# Altium PCB PCB_LED.PcbDoc
Units mil, origin at the board's own origin, x right, y up, seen from the top; angles counter-clockwise.
Board outline 600 x 300 mil, 2 copper layers (Top Layer, Bottom Layer); 3 components, 3 nets, 6 pads, 0 vias.
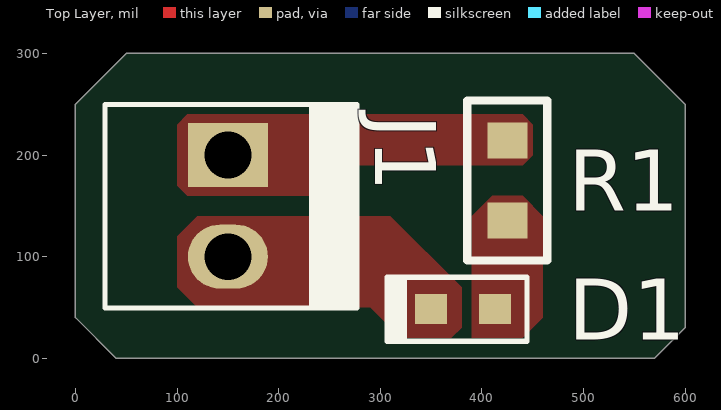
[diagram p0: Top Layer view]
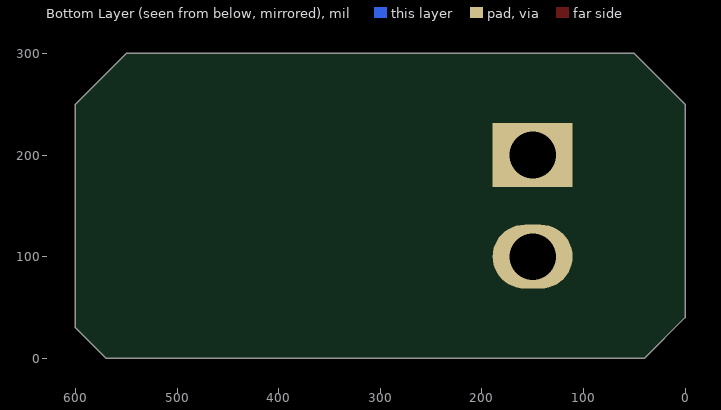
[diagram p1: Bottom Layer view, seen from below]
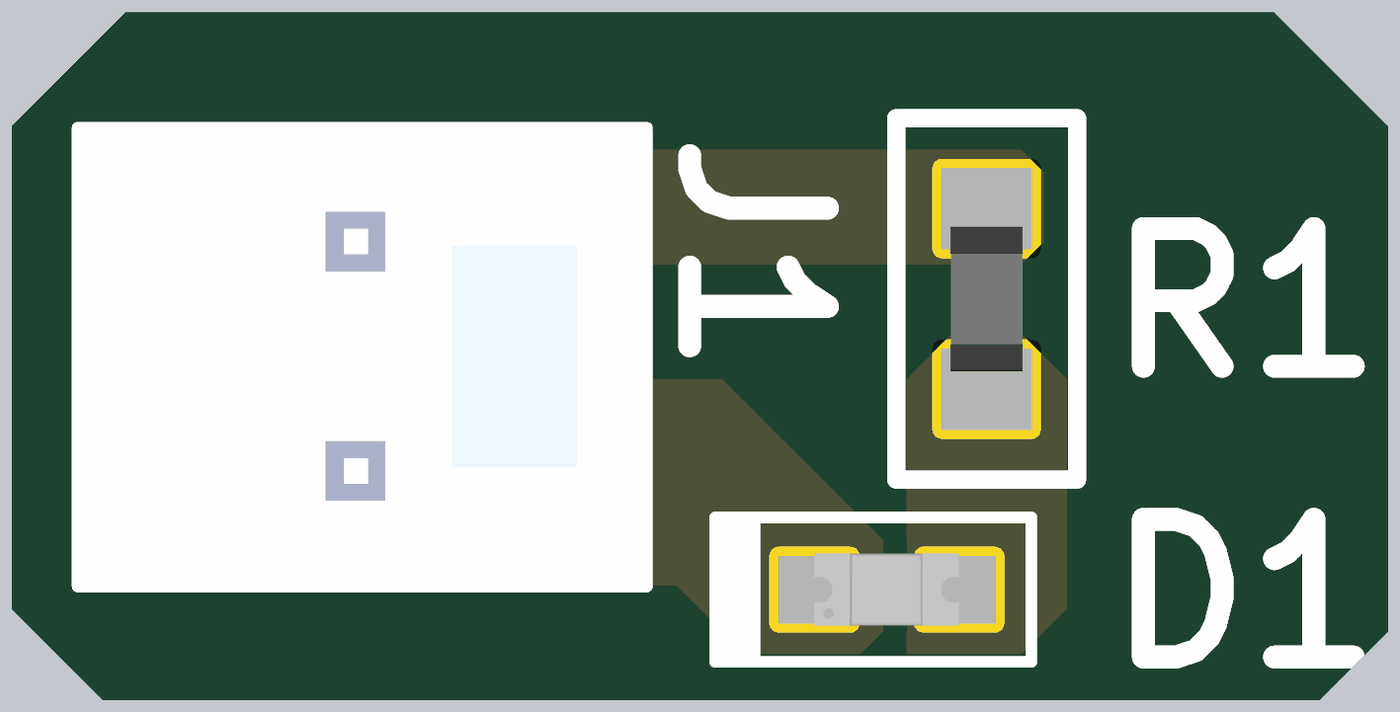
[diagram p2: 3D render of the assembled board from above, using the file's embedded part models]

## Layer stack, top to bottom
Top Solder: solder mask 0.4, Solder Resist, Dk 3.5
Top Layer: signal copper 1.4
Dielectric 1: dielectric 12.6, FR-4, Dk 4.8
Bottom Layer: signal copper 1.4
Bottom Solder: solder mask 0.4, Solder Resist, Dk 3.5

## Board outline
40,0 570,0 600,30 600,250 550,300 50,300 0,250 0,40

## Design rules (kind name [scope] priority, off if disabled: settings)
Clearance [All] p1: gap=10 ignorepadtopadclearanceinfootprint=FALSE except(0: Arc-Hole Track-Hole SMDPad-Hole THPad-Hole Via-Hole Fill-Hole Poly-Hole Region-Hole Text-Hole)
PolygonConnect [All] p1: connectstyle=Direct reliefconductorwidth=10 reliefentries=4 polygonreliefangle="90 Angle" airgapwidth=10
RoutingVias [All] p1: holewidth=28 width=50 viastyle="Through Hole" minholewidth=28 minwidth=50 maxholewidth=28 maxwidth=50
SolderMaskExpansion [All] p1: expansion=4 istentingtop=FALSE
Width [All] p1: maxlimit=10 minlimit=10 preferedwidth=10
30 further rules are at their usual default settings.

## Components (designator, comment, footprint, x,y, rotation, side; value= is the part's Value field where it differs from the comment)
D1 "Green LED" GREEN_LED 381.5,48.25 r0 top
J1 "1x2 Header" Molex_1x2 150,150 r0 top
R1 "68R RESISTOR" R68 425,175 r90 top

## Footprints (in the part's own frame and the unit in brackets; to place one, negate y for a bottom-side part, rotate by r counter-clockwise, add the part's x,y. Pads: shape width x height; smd on the part's side, far side on the other; paste and mask are expansions set on the pad)
GREEN_LED [mm]
  rect 0.8x0.75 smd: 1(-0.8,0) 2(0.8,0)
  silkscreen extent -1.9,-0.8 1.6,0.8, body extent -0.8,-0.4 0.8,0.4, height 0.41
Molex_1x2 [mm]
  rect 2x1.6 hole 1.17: 1(0,1.27)
  oval 2x1.6 hole 1.17: 2(0,-1.27)
  silkscreen extent -3.08,-2.55 3.23,2.53, body extent -3.1,-2.54 3.25,2.54, height 10.68
R68 [mm]
  rect 0.9x1 smd: 1(-1,0) 2(1,0)
  silkscreen extent -2,-1 2,1, body extent -0.8,-0.4 0.8,0.4, height 0.46

## Part data
D1: library part 150060VS55040, "WL-SMCD SMT Mono-color Chip LED Diffused", Case Code (Imperial)=0603, Case Code (Metric)=1608, Color=Green, Forward Current=40mA, Forward Voltage=2V, Manufacturer="Wurth Electronics", Max Operating Temperature=85°C, Max Reverse Voltage (DC)=5V, Min Operating Temperature=-40°C, Power Dissipation=48mW, Supplier Part Number 1=732-12017-1-ND, Test Current=20mA, Case/Package=0603, Category=LEDs, ComponentLink1Description=http://www.farnell.com/datasheets/2621647.pdf?src-supplier=Farnell, ComponentLink1URL=http://www.farnell.com/datasheets/2621647.pdf?src-supplier=Farnell, ComponentLink2Description=https://www.we-online.de/web/en/index.php/download/media/07_electronic_components/download_center_1/application_notes_berichte/ano002_leds___the_future_of_horticultural_lighting/ANO002b_EN_LEDs_The_Future_of_Horticultural_Lighting.pdf?src-supplier=Digikey, ComponentLink2URL=https://www.we-online.de/web/en/index.php/download/media/07_electronic_components/download_center_1/application_notes_berichte/ano002_leds___the_future_of_horticultural_lighting/ANO002b_EN_LEDs_The_Future_of_Horticultural_Lighting.pdf?src-supplier=Digikey, ComponentLink3Description=https://katalog.we-online.de/pbs/datasheet/150060VS55040.pdf?src-supplier=Digikey, ComponentLink3URL=https://katalog.we-online.de/pbs/datasheet/150060VS55040.pdf?src-supplier=Digikey, ComponentLink4Description=http://www.farnell.com/datasheets/2621647.pdf?src-supplier=Element14, ComponentLink4URL=http://www.farnell.com/datasheets/2621647.pdf?src-supplier=Element14, ComponentLink5Description=http://www.farnell.com/datasheets/2621647.pdf?src-supplier=Newark, ComponentLink5URL=http://www.farnell.com/datasheets/2621647.pdf?src-supplier=Newark, Dominant Wavelength=573nm, Height=0.5mm, Length=1.6mm, Lens Size=0.8mm, Lens Style=Flat, Lens Transparency=Diffused, Luminous Intensity=60mcd, Manufacturer Part Number=150060VS55040, Mount="Surface Mount", Packaging="Cut Tape", Pricing 1="1=0,19, 10=0,173, 100=0,157, 500=0,141, 1000=0,125 (USD)", Reverse Voltage=5V, RoHS=Yes, RoHS Compliant=Yes, Series=WL-SMDC, Stock 1=10387, Supplier 1=Digikey, Viewing Angle=140°, Wavelength=573nm, Width=0.8mm
J1: library part 22-29-2021, "KK 254 Wire-to-Board Header, Vertical, with Friction Lock, 2 Circuits, Gold (Au) Plating", Color=White, Flammability Rating="UL94 V-0", Housing Color=Natural, Manufacturer=Molex, Package Quantity=24000, Supplier Part Number 1=WM2744-ND, Voltage Rating (DC)=250V, Category="Headers and Wire Housings", Contact Material=Tin, Contact Plating=Gold, Contact Type=-, Gender=Male, Glow Wire Compliant=Non-compliant, Halogen Free="Low Halogen", Lead Free="Lead Free", Manufacturer Part Number=22-29-2021, Number of Positions=2, Number of Rows=1, Packaging=Bulk, Plating=Tin, Pricing 1="1=0,34, 10=0,286, 100=0,2225, 3000=0,18654 (USD)", Reach SVHC Compliant=Unknown, RoHS=Yes, RoHS Compliant=Yes, Series=6410, Stock 1=124558, Supplier 1=Digikey, Termination="Through Hole"
R1: library part CRCW080568R0FKEAC, "SMD Chip Resistor, 68 Ohm, ± 1%, 125 mW, 0805 [2012 Metric], Thick Film, General Purpose", Manufacturer=Vishay, Supplier Part Number 1=541-CRCW080568R0FKEACCT-ND, Category="Chip SMD Resistors", Manufacturer Part Number=CRCW080568R0FKEAC, Pricing 1="1=0,1, 10=0,036, 50=0,0234, 100=0,0197, 500=0,01372, 1000=0,01194 (USD)", RoHS=Yes, RoHS Compliant=Yes, Stock 1=117217, Supplier 1=Digikey

## Nets (pads, with @x,y where several pads share a name; then routed paths per layer and width w, separated by ;. In a path a pad name is that pad's centre, name@x,y a point inside that pad or via, vN(x,y) a via of type N, cw(c..) or ccw(c..) an arc to the next point about the centre after c; other vN are vias at no path point)
NetD1_1: D1.1 J1.2
NetD1_2: D1.2 R1.1
NetJ1_1: J1.1 R1.2

## Polygon pours and split planes (outlines as drawn)
NetD1_2 on Top Layer "di2" (solid, pour order 3): 390,140 390,70 390,20 440,20 460,40 460,140 440,160 410,160
NetD1_1 on Top Layer "GND" (solid, pour order 2): 120,50 290,50 320,20 370,20 380,30 380,70 310,140 120,140 100,120 100,70
NetJ1_1 on Top Layer "GND" (solid, pour order 0): 100,170 100,230 110,240 440,240 450,230 450,200 440,190 270,190 240,160 110,160